# Altium PCB HW_Z-BAND_SMART_AMP_R1.PcbDoc (part 2 of 5)
Units mil, origin at the board's own origin, x right, y up, seen from the top; angles counter-clockwise.
Board outline 10200 x 3900 mil, 4 copper layers (Top Layer, Int1 (GND), Int2 (PWR), Bottom Layer), stack 60.134 mil thick; 398 components, 240 nets, 1098 pads, 2492 vias.
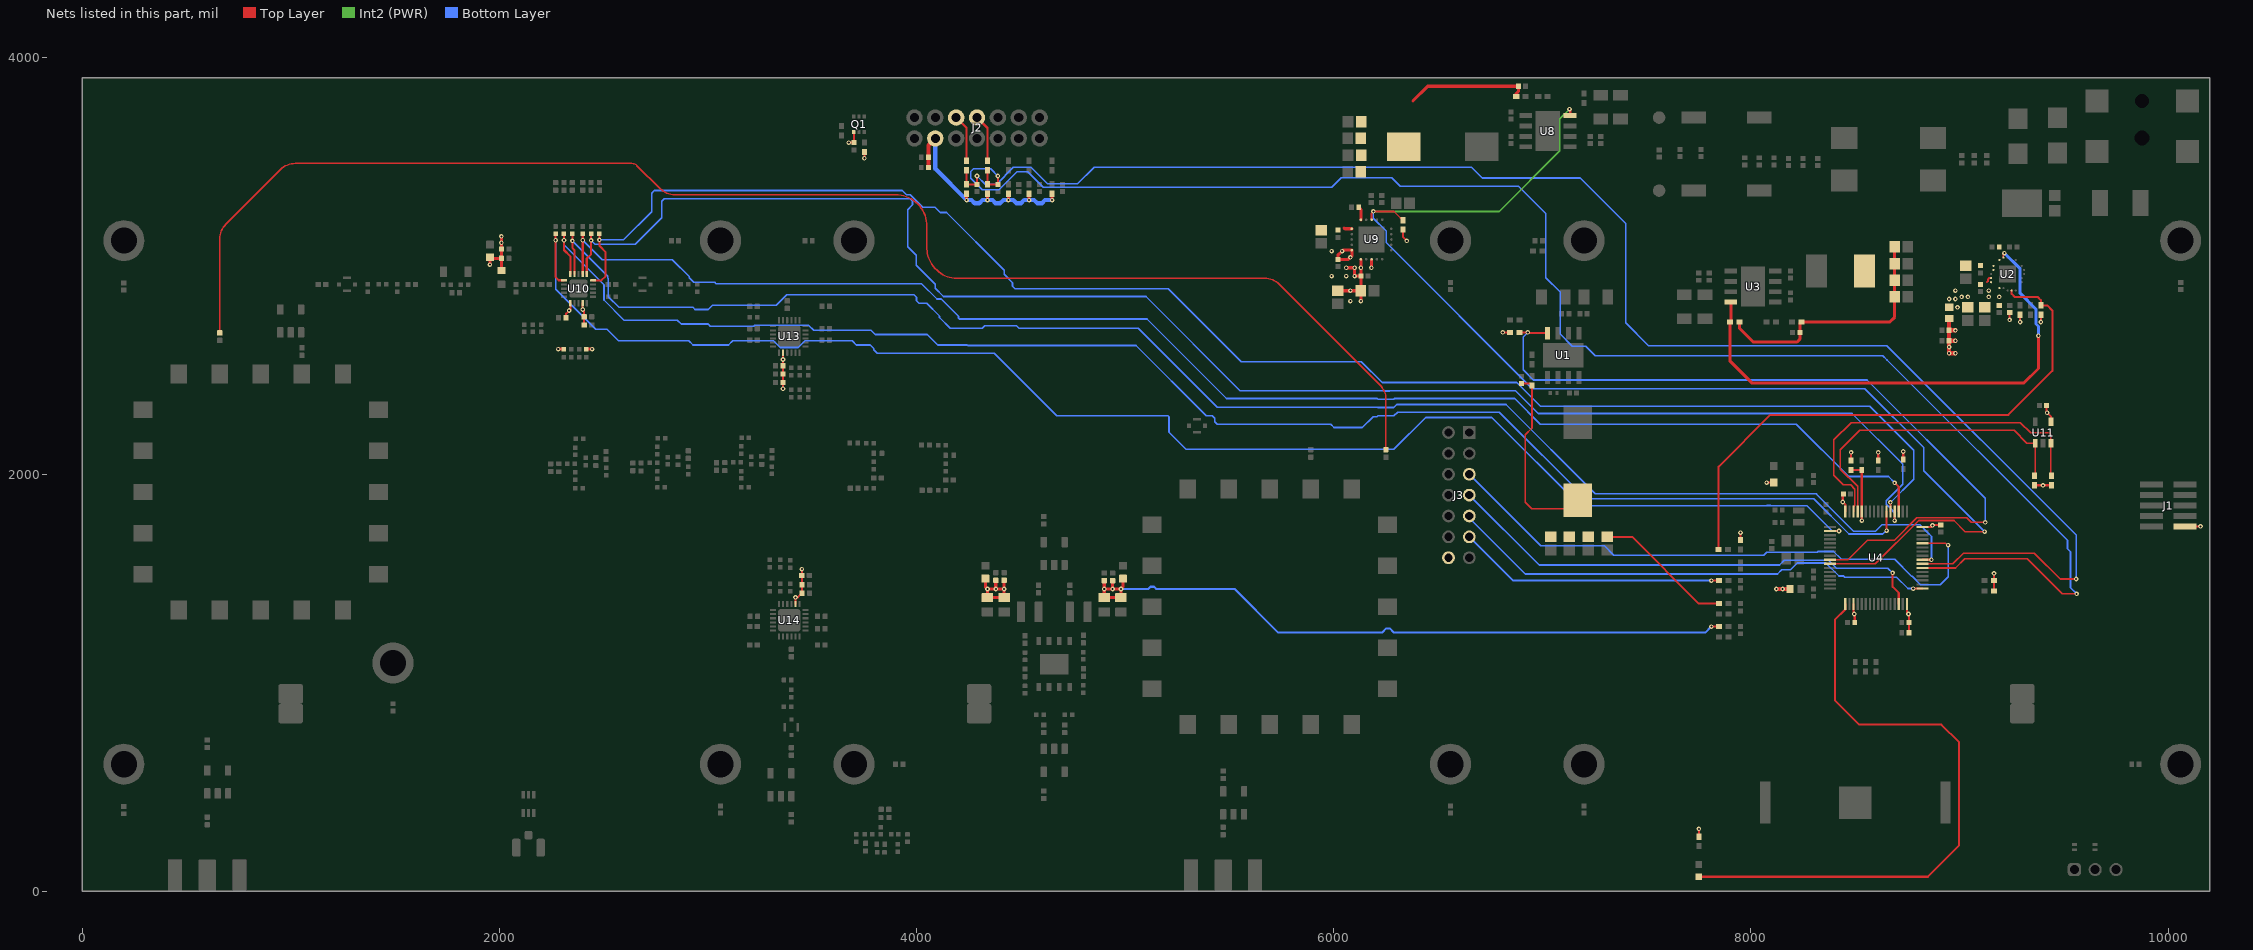
[diagram p4: the nets of this part, all layers, seen from the top]

## Footprints (in the part's own frame and the unit in brackets; to place one, negate y for a bottom-side part, rotate by r counter-clockwise, add the part's x,y. Pads: shape width x height; smd on the part's side, far side on the other; paste and mask are expansions set on the pad) (continued)
LQFP-64 [mil]
  rect 58x11 smd paste+0 mask+0: 1(-221.5,147.64) 2(-221.5,127.95) 3(-221.5,108.27) 4(-221.5,88.58) 5(-221.5,68.9) 6(-221.5,49.21) 7(-221.5,29.53) 8(-221.5,9.84) 9(-221.5,-9.84) 10(-221.5,-29.53) 11(-221.5,-49.21) 12(-221.5,-68.9) 13(-221.5,-88.58) 14(-221.5,-108.27) 15(-221.5,-127.95) 16(-221.5,-147.64) 33(221.5,-147.64) 34(221.5,-127.95) 35(221.5,-108.27) 36(221.5,-88.58) 37(221.5,-68.9) 38(221.5,-49.21) 39(221.5,-29.53) 40(221.5,-9.84) 41(221.5,9.84) 42(221.5,29.53) 43(221.5,49.21) 44(221.5,68.9) 45(221.5,88.58) 46(221.5,108.27) 47(221.5,127.95) 48(221.5,147.64)
  rect 11x58 smd paste+0 mask+0: 17(-147.64,-221.5) 18(-127.95,-221.5) 19(-108.27,-221.5) 20(-88.58,-221.5) 21(-68.9,-221.5) 22(-49.21,-221.5) 23(-29.53,-221.5) 24(-9.84,-221.5) 25(9.84,-221.5) 26(29.53,-221.5) 27(49.21,-221.5) 28(68.9,-221.5) 29(88.58,-221.5) 30(108.27,-221.5) 31(127.95,-221.5) 32(147.64,-221.5) 49(147.64,221.5) 50(127.95,221.5) 51(108.27,221.5) 52(88.58,221.5) 53(68.9,221.5) 54(49.21,221.5) 55(29.53,221.5) 56(9.84,221.5) 57(-9.84,221.5) 58(-29.53,221.5) 59(-49.21,221.5) 60(-68.9,221.5) 61(-88.58,221.5) 62(-108.27,221.5) 63(-127.95,221.5) 64(-147.64,221.5)
  silkscreen extent -270,-270 270,270, body extent -236,-236 236,236, height 63
MTG-PTH-3MM [mm]
  round 5 hole 3.175: 0(0,0)
"MURATA GRM155 0402_1005" [mm] "Chip Capacitor, 2-Leads, Body 1.0x0.50mm"
  rect 0.4x0.5 smd: 1(-0.4,0) 2(0.4,0)
  silkscreen extent -0.9,-0.5 0.9,0.5, body extent -0.52,-0.27 0.53,0.28, height 0.55
NU-1620 [mm] "W:30 L:30 P:5 mm"
  rect 2.31x2 smd: 1(-14.35,10) 2(-14.35,5) 3(-14.35,0) 4(-14.35,-5) 5(-14.35,-10) 11(14.35,-10) 12(14.35,-5) 13(14.35,0) 14(14.35,5) 15(14.35,10)
  rect 2x2.31 smd: 6(-10,-14.35) 7(-5,-14.35) 8(0,-14.35) 9(5,-14.35) 10(10,-14.35) 16(10,14.35) 17(5,14.35) 18(0,14.35) 19(-5,14.35) 20(-10,14.35)
  silkscreen extent -16.18,-15.08 15.08,15.07, body extent -15,-15 15,15, height 7.11
ONSC-SC70-6-419B-02_W_V [mm] "SOT23, 6-Leads, Body 2x1.25mm, Pitch 0.65mm"
  rect 0.5x0.4 smd: 1(-0.95,0.65) 2(-0.95,0) 3(-0.95,-0.65) 4(0.95,-0.65) 5(0.95,0) 6(0.95,0.65)
  silkscreen extent -1.07,-1 0.3,1.53, body extent -0.63,-1 0.63,1, height 1.1
QFN_20_PE4312 [mm] "W:4 L:4 P:0.5mm"
  rrect25% 0.75x0.28 smd: 1(-1.777,1) 2(-1.777,0.5) 3(-1.777,0) 4(-1.777,-0.5) 5(-1.777,-1) 11(1.777,-1) 12(1.777,-0.5) 13(1.777,0) 14(1.777,0.5) 15(1.777,1)
  rrect25% 0.28x0.75 smd: 6(-1,-1.777) 7(-0.5,-1.777) 8(0,-1.777) 9(0.5,-1.777) 10(1,-1.777) 16(1,1.777) 17(0.5,1.777) 18(0,1.777) 19(-0.5,1.777) 20(-1,1.777)
  rrect25% 2.2x2.2 smd: 21(0,0)
  silkscreen extent -2.13,-2.13 2.13,2.13, body extent -2,-2 2,2, height 0.99
"RES 0402_1005" [mm] "Chip Resistor, 2-Leads, Body 1.0x0.5mm, IPC Medium Density"
  rect 0.75x0.6 smd: 1(-0.575,0) 2(0.575,0)
  silkscreen extent -1.14,-0.51 1.14,0.51, body extent -0.5,-0.25 0.5,0.25, height 0.35
RES_0402_N [mm] "W:0.5 L:1 P:0.9 mm"
  rrect10% 0.55x0.55 smd: 1(-0.45,0) 2(0.45,0)
  body extent -0.53,-0.28 0.53,0.28, height 0.4
RES_0805_N [mm] "W:1.30 L:2.15 P:1.75mm IPC Medium Density"
  rrect10% 1.1x1.4 smd mask+0.102: 1(-0.875,0) 2(0.875,0)
  body extent -1.07,-0.7 1.08,0.7, height 0.6
SC70_SOT-363 [mm] "W:1.25 L:2.00 P:0.65mm"
  rrect10% 0.95x0.4 smd: 1(-1.1,0.65) 2(-1.1,0) 3(-1.1,-0.65) 4(1.1,-0.65) 5(1.1,0) 6(1.1,0.65)
  silkscreen extent -1.14,-1 0.3,1.52, body extent -1.2,-1.07 1.2,1.07, height 1.1
SOD-123 [mm] "SOD, 2-Leads, Body 1.55x3.70mm, IPC Medium Density"
  rect 0.9x0.95 smd: 1(-1.575,0) 2(1.575,0)
  silkscreen extent -2.3,-0.92 2.41,0.92, body extent -1.86,-0.78 1.86,0.77, height 1.35
SOIC-8N_EP [mm]
  rect 0.95x0.55 smd: 1(-2.8,1.905) 2(-2.8,0.635) 3(-2.8,-0.635) 4(-2.8,-1.905) 5(2.8,-1.905) 6(2.8,-0.635) 7(2.8,0.635) 8(2.8,1.905)
  rect 2.5x3.5 smd paste-1.25: 9(0,0)
  silkscreen extent -3.21,-2.58 2.07,2.58, body extent -3.05,-2.5 3.05,2.5, height 1.6
SOT89 [mm] "W:4.50 L:4.2 P:1.50mm"
  rect 1.27x0.86 smd: 1(-1.8,1.5) 3(-1.8,-1.5)
  round 0.025 smd: 2(0.037,0)
  silkscreen extent -2,-2.3 1.32,2.47, body extent -2.2,-2.3 1.85,2.3, height 1.6
TDK-ACM1211-4_V [mm] "SMD, 4-Leads, Body 12.3x11.3mm, Pitch 5.2mm"
  rect 3.2x2.7 smd: 1(-5.4,-2.6) 2(-5.4,2.6) 3(5.4,2.6) 4(5.4,-2.6)
  silkscreen extent -7.68,-5.65 6.15,5.65, body extent -6.15,-5.67 6.15,5.65, height 6
TEST_POINT_SMD [mil]
  round 60 smd: 1(0,0)
WE-LHCA_7030 [mm] "SMD Power Inductor, 2-Leads, body 6.95 x 6.60 mm"
  rect 4x2.55 smd: 1(0,2.925) 2(0,-2.925)
  silkscreen extent -3.45,-3.45 3.45,4.82, body extent -3.3,-3.47 3.3,3.48, height 3.01
WE-LHMI_1040 [mm] "SMT Power Inductor, 2-Leads, body 10x10mm"
  rect 4.1x3.5 smd: 1(-1274.75,-1270) 2(-1265.25,-1270)
  Top Layer keep-out region: -1272.6,-1264.85 -1267.4,-1264.85 -1267.4,-1275.15 -1272.6,-1275.15
  silkscreen extent -1277.42,-1275.15 -1264.85,-1264.85, body extent -1275.5,-1275 -1264.5,-1265, height 3.8
WE-PBF_8530_L9.5W3H3.1 [mm] "Flat Wire High Current SMT Ferrite Bead, body 9.50x3.00mm"
  rect 3x1.47 smd: 1(-4,0) 2(4,0)
  silkscreen extent -4.4,-1.6 4.4,1.6, body extent -4.45,-1.5 4.45,1.5, height 2.76
"WURTH WE-PHD 61300311121" [mm] "Pin Header, pitch 2.54 mm, THT, Vertical, single row, 3p"
  rrect50% 1.6x1.6 hole 1.1: 1(-2.54,0)
  round 1.6 hole 1.1: 2(0,0) 3(2.54,0)
  silkscreen extent -4.53,-1.35 3.96,1.35, body extent -3.81,-1.27 3.81,1.27, height 8.57

## Part data
BT1: library part CMP-19636-000006-1, "BATTERY RETAINER COIN 20MM SMD", Manufacturer="Keystone Electronics", Automotive=No, Category=Batt, ComponentLink2Description=Datasheet, ComponentLink2URL=https://www.keyelco.com/product-pdf.cfm?p=798, Contact Material=Nickel, Device Class L1=Connectors, Device Class L2=unset, Device Class L3=unset, Digikey Description="BATTERY RETAINER COIN 20MM SMD", Height=4.31mm, Lead Free=Yes, Manufacturer Part Number=3034, Mouser Description="Coin Cell Battery Holders COIN CELL RETAINER", Number of Contacts=2, Octopart=https://octopart.com/3034-keystone-27554462, Package=3034, RoHS=TRUE
C1 C17 C43 C71 C74 C90 C96: library part GRM155C71A105KE11D, "CAP CER 1UF 10V X7S 0402", Device Package="0402 (1005 Metric)", Manufacturer="Murata Electronics", Operating Temperature="-55°C ~ 125°C", Supplier Part Number 1=490-14457-1-ND, Temperature Coefficient=X7S, Tolerance=±10%, Voltage - Rated=10V, Applications="General Purpose", Capacitance="1 µF", ComponentLink1Description=Datasheet, ComponentLink1URL=https://search.murata.co.jp/Ceramy/image/img/A01X/G101/ENG/GRM155C71A105KE11-01.pdf, ComponentLink2Description="DigiKey Link", ComponentLink2URL=https://www.digikey.com/en/products/detail/murata-electronics/GRM155C71A105KE11D/6606086, Lifecycle Status=Active, Minimum Order=1, Mounting Type="Surface Mount, MLCC", Package / Case="0402 (1005 Metric)", Packaging=TapeAndReel, Part Number=GRM155C71A105KE11D, Part Status=Active, PartId=1749, Price=0.01, Series=GRM, Size / Dimension="0.039\" L x 0.020\" W (1.00mm x 0.50mm)", Supplier 1=DigiKey, Thickness (Max)="0.024\" (0.60mm)"
  C1: LastUpdated="23.07.2025 10:42:36"
  C17 C43 C71 C74 C90 C96: LastUpdated="4/6/2026 7:11:12 PM"
C2 C5 C6 C14 C15 C16 C18 C19 C20 C21 C22 C23 C24 C27 C30 C33 C44 C47 C48 C54 C63 C64 C66 C72 C73 C75 C78 C79 C86 C91 C92 C94 C95 C97 C98 C100 C103: library part GCM155R71H104KE02J, "CAP CER 0.1UF 50V X7R 0402", Device Package="0402 (1005 Metric)", Manufacturer="Murata Electronics", Operating Temperature="-55°C ~ 125°C", Ratings=AEC-Q200, Supplier Part Number 1=490-14514-1-ND, Temperature Coefficient=X7R, Tolerance=±10%, Voltage - Rated=50V, Applications=Automotive, Capacitance="0.1 µF", ComponentLink1Description=Datasheet, ComponentLink1URL=https://search.murata.co.jp/Ceramy/image/img/A01X/G101/ENG/GCM155R71H104KE02-01.pdf, ComponentLink2Description="DigiKey Link", ComponentLink2URL=https://www.digikey.com/en/products/detail/murata-electronics/GCM155R71H104KE02J/4903705, LastUpdated="4/6/2026 7:10:30 PM", Lifecycle Status=Active, Minimum Order=1, Mounting Type="Surface Mount, MLCC", Package / Case="0402 (1005 Metric)", Packaging=TapeAndReel, Part Number=GCM155R71H104KE02J, Part Status=Active, PartId=11356, Price=0.01, Series=GCM, Size / Dimension="0.039\" L x 0.020\" W (1.00mm x 0.50mm)", Supplier 1=DigiKey, Thickness (Max)="0.022\" (0.55mm)"
C3 C4 C45 C46 C76 C77: library part CL31B106KBHNNNE, "CAP CER 10UF 50V X7R 1206", Device Package="1206 (3216 Metric)", Manufacturer="Samsung Electro-Mechanics", Operating Temperature="-55°C ~ 125°C", Supplier Part Number 1=1276-6767-1-ND, Temperature Coefficient=X7R, Tolerance=±10%, Voltage - Rated=50V, Applications="General Purpose", Capacitance="10 µF", ComponentLink1Description=Datasheet, ComponentLink1URL=http://www.samsungsem.com/kr/support/product-search/mlcc/CL31B106KBHNNNE.jsp, ComponentLink2Description="DigiKey Link", ComponentLink2URL=https://www.digikey.com/en/products/detail/samsung-electro-mechanics/CL31B106KBHNNNE/5961251, LastUpdated="4/6/2026 7:38:00 PM", Lifecycle Status=Active, Minimum Order=1, Mounting Type="Surface Mount, MLCC", Package / Case="1206 (3216 Metric)", Packaging=TapeAndReel, Part Number=CL31B106KBHNNNE, Part Status=Active, PartId=40563, Price=0.06, Series=CL, Size / Dimension="0.126\" L x 0.063\" W (3.20mm x 1.60mm)", Supplier 1=DigiKey, Thickness (Max)="0.071\" (1.80mm)"
C7 C12 C13 C25 C28 C31 C34 C36 C37 C38 C39 C40 C41 C42 C49 C67 C80 C87 C160 C161 C162 C163: library part C0402H102J1GAC7867, "CAP CER 1000PF 100V C0G/NP0 0402", Device Package="0402 (1005 Metric)", Manufacturer=KEMET, Operating Temperature="-55°C ~ 200°C", Supplier Part Number 1=399-11931-1-ND, Temperature Coefficient="C0G, NP0", Tolerance=±5%, Voltage - Rated=100V, Applications=Downhole, Capacitance="1000 pF", ComponentLink1Description=Datasheet, ComponentLink1URL=https://api.kemet.com/component-edge/download/datasheet/C0402H102J1GAC7867.pdf, ComponentLink2Description="DigiKey Link", ComponentLink2URL=https://www.digikey.com/en/products/detail/kemet/C0402H102J1GAC7867/5267578, Features="Low ESL, High Temperature", LastUpdated="3/30/2026 7:10:31 PM", Lifecycle Status=Active, Minimum Order=1, Mounting Type="Surface Mount, MLCC", Package / Case="0402 (1005 Metric)", Packaging=TapeAndReel, Part Number=C0402H102J1GAC7867, Part Status=Active, PartId=3822, Price=0.24, Series="SMD Indust C0G HT200C", Size / Dimension="0.039\" L x 0.020\" W (1.00mm x 0.50mm)", Supplier 1=DigiKey, Thickness (Max)="0.022\" (0.55mm)"
C8 C9 C10 C11 C50 C51 C52 C53 C65 C69 C70 C81 C82 C83 C84 C85 C88 C89: library part CL21A226KOQNNNE, "CAP CER 22UF 16V X5R 0805", Device Package="0805 (2012 Metric)", Manufacturer="Samsung Electro-Mechanics", Operating Temperature="-55°C ~ 85°C", Supplier Part Number 1=1276-6526-1-ND, Temperature Coefficient=X5R, Tolerance=±10%, Voltage - Rated=16V, Applications="General Purpose", Capacitance="22 µF", ComponentLink1Description=Datasheet, ComponentLink1URL=http://www.samsungsem.com/kr/support/library/product-catalog/mlcc.jsp, ComponentLink2Description="DigiKey Link", ComponentLink2URL=https://www.digikey.com/en/products/detail/samsung-electro-mechanics/CL21A226KOQNNNE/5961010, LastUpdated="4/6/2026 7:33:17 PM", Lifecycle Status=Active, Minimum Order=1, Mounting Type="Surface Mount, MLCC", Package / Case="0805 (2012 Metric)", Packaging=TapeAndReel, Part Number=CL21A226KOQNNNE, Part Status=Active, PartId=3004, Price=0.06, Series=CL, Size / Dimension="0.079\" L x 0.049\" W (2.00mm x 1.25mm)", Supplier 1=DigiKey, Thickness (Max)="0.055\" (1.40mm)"
C26 C29 C32 C35: library part CC0402JRNPO0BN101, "CAP CER 100PF 100V C0G/NPO 0402", Device Package="0402 (1005 Metric)", Manufacturer=Yageo, Operating Temperature="-55°C ~ 125°C", Supplier Part Number 1=13-CC0402JRNPO0BN101CT-ND, Temperature Coefficient="C0G, NP0", Tolerance=±5%, Voltage - Rated=100V, Applications="General Purpose", Capacitance="100 pF", ComponentLink1Description=Datasheet, ComponentLink1URL=https://www.yageo.com/upload/media/product/productsearch/datasheet/mlcc/UPY-NP0X7R_MV_100-to-630V_24.pdf, ComponentLink2Description="DigiKey Link", ComponentLink2URL=https://www.digikey.com/en/products/detail/yageo/CC0402JRNPO0BN101/11490291, LastUpdated="4/6/2026 7:09:54 PM", Lifecycle Status=Active, Minimum Order=1, Mounting Type="Surface Mount, MLCC", Package / Case="0402 (1005 Metric)", Packaging=TapeAndReel, Part Number=CC0402JRNPO0BN101, Part Status=Active, PartId=44692, Price=0.01, Series=CC, Size / Dimension="0.039\" L x 0.020\" W (1.00mm x 0.50mm)", Supplier 1=DigiKey, Thickness (Max)="0.022\" (0.55mm)"
C55 C68 C93 C102 C104: library part AC0402KPX7R9BB103, "CAP CER 10000PF 50V X7R 0402", Device Package="0402 (1005 Metric)", Manufacturer=Yageo, Operating Temperature="-55°C ~ 125°C", Ratings=AEC-Q200, Supplier Part Number 1=311-3267-1-ND, Temperature Coefficient=X7R, Tolerance=±10%, Voltage - Rated=50V, Applications=Automotive, Capacitance="10000 pF", ComponentLink1Description=Datasheet, ComponentLink1URL=http://www.yageo.com/documents/recent/UPY-AC_NP0X7R_16V-to-630V_12.pdf, ComponentLink2Description="DigiKey Link", ComponentLink2URL=https://www.digikey.com/en/products/detail/yageo/AC0402KPX7R9BB103/6643253, LastUpdated="4/6/2026 7:11:07 PM", Lifecycle Status=Active, Minimum Order=1, Mounting Type="Surface Mount, MLCC", Package / Case="0402 (1005 Metric)", Packaging=CutTape, Part Number=AC0402KPX7R9BB103, Part Status=Active, PartId=2384, Price=0.01, Series=AC, Size / Dimension="0.039\" L x 0.020\" W (1.00mm x 0.50mm)", Supplier 1=DigiKey, Thickness (Max)="0.022\" (0.55mm)"
C56: library part GRM155R71H104KE14J, "CAP CER 0.1UF 50V X7R 0402", Device Package="0402 (1005 Metric)", Manufacturer="Murata Electronics", Operating Temperature="-55°C ~ 125°C", Supplier Part Number 1=490-13342-1-ND, Temperature Coefficient=X7R, Tolerance=±10%, Voltage - Rated=50V, Applications="General Purpose", Capacitance="0.1 µF", ComponentLink1Description=Datasheet, ComponentLink1URL=https://search.murata.co.jp/Ceramy/image/img/A01X/G101/ENG/GRM155R71H104KE14-01.pdf, ComponentLink2Description="DigiKey Link", ComponentLink2URL=https://www.digikey.com/en/products/detail/murata-electronics/GRM155R71H104KE14J/4905180, LastUpdated="4/6/2026 7:11:00 PM", Lifecycle Status=Active, Minimum Order=1, Mounting Type="Surface Mount, MLCC", Package / Case="0402 (1005 Metric)", Packaging=CutTape, Part Number=GRM155R71H104KE14J, Part Status=Active, PartId=4071, Price=0.01, Series=GRM, Size / Dimension="0.039\" L x 0.020\" W (1.00mm x 0.50mm)", Supplier 1=DigiKey, Thickness (Max)="0.022\" (0.55mm)"
C57 C58 C59 C62: library part CC0402GRNPO9BN150, "CAP CER 15PF 50V C0G/NPO 0402", Device Package="0402 (1005 Metric)", Manufacturer=Yageo, Operating Temperature="-55°C ~ 125°C", Supplier Part Number 1=311-1649-1-ND, Temperature Coefficient="C0G, NP0", Tolerance=±2%, Voltage - Rated=50V, Applications="General Purpose", Capacitance="15 pF", ComponentLink1Description=Datasheet, ComponentLink1URL=https://www.yageo.com/upload/media/product/productsearch/datasheet/mlcc/UPY-GP_NP0_16V-to-50V_17.pdf, ComponentLink2Description="DigiKey Link", ComponentLink2URL=https://www.digikey.com/en/products/detail/yageo/CC0402GRNPO9BN150/5195058, LastUpdated="4/6/2026 7:11:11 PM", Lifecycle Status=Active, Minimum Order=1, Mounting Type="Surface Mount, MLCC", Package / Case="0402 (1005 Metric)", Packaging=TapeAndReel, Part Number=CC0402GRNPO9BN150, Part Status=Active, PartId=1901, Price=0.01, Series=CC, Size / Dimension="0.039\" L x 0.020\" W (1.00mm x 0.50mm)", Supplier 1=DigiKey, Thickness (Max)="0.022\" (0.55mm)"
C60 C138 C155: "CAP CER 4.7uF 16V X7R 0603 ±10%", Manufacturer 1="MURATA ELECTRONICS", Manufacturer Part Number 1=GRM188Z71C475KE21D, Package=0603, PackageType=SMD, Supplier Part Number 1=490-GRM188Z71C475KE21DTR-ND, Tolerance=±10%, Check=Approved, ComponentLink1Description=DigiKey, ComponentLink1URL=https://www.digikey.com/en/products/detail/murata-electronics/GRM188Z71C475KE21D/13401930, ComponentLink2Description=Datasheet, ComponentLink2URL="D:\SAVRONIK_SVN\Donanım\trunk\ALTIUM\Central Library\Datasheets\Capacitor\GRM188Z71C475KE21-01A_Datasheet.pdf", Location=NA, MaxHeight_mm=0.95, MSL Level=Level-1, Status=Active, Supplier 1=Digikey, UnitPrice=0.28
C61 C101 C105 C125 C126 C127 C128 C136 C153: "CAP CER 100nF 50V X7R 0402 ±10%", Manufacturer 1="TDK CORPORATION", Manufacturer Part Number 1=CGA2B3X7R1H104K050BB, Package=0402, PackageType=SMD, Supplier Part Number 1=445-6899-2-ND, Tolerance=±10%, Check=Approved, ComponentLink2Description=Datasheet, ComponentLink2URL="D:\SAVRONIK_SVN\Donanım\trunk\ALTIUM\Central Library\Datasheets\Capacitor\CGA2B3X7R1H104K050BB_Datasheet.pdf", ComponentLink3Description=DigiKey, ComponentLink3URL=https://www.digikey.com/en/products/detail/tdk-corporation/CGA2B3X7R1H104K050BB/2672792, Location=NA, MaxHeight_mm=0.55, MSL Level=Level-1, Status=Active, Supplier 1=Digikey, UnitPrice=0.1
C99 C118 C119 C120 C121 C122 C123 C124 C129: "CAP CER 100pF 50V NP0 0402 ±1%", M_OperatingPower(W)=NA, M_RatedVoltage(V)=50, Manufacturer 1=TDK, Manufacturer Part Number 1=C1005C0G1H101F050BA, Package=0402, PackageType=SMD, Supplier Part Number 1=445-5362-2-ND, Tolerance=±1%, Check=Approved, ComponentLink2Description=Datasheet, ComponentLink3Description=DigiKey, ComponentLink3URL=https://www.digikey.com/en/products/detail/tdk-corporation/C1005C0G1H101F050BA/2269856?s=N4IgTCBcDaIMIEYAMSCsckHEEAlkIDE0kAhAQRAF0BfIA, Location=NA, M_AmpersPerContact=NA, M_Duty Cycle(%)=NA, M_MatingCycle=NA, M_Number_of_Bits(K)=NA, M_Number_of_Pins=2, M_Number_of_Transistors_Gates_or_Bits=NA, M_ProgrammingCycles=NA, M_RatedPower(W)=NA, M_ThermalResistance(θJABC)(°C/W)=NA, MaxHeight_mm=0.55, MSL Level=Level-1, Status=Active, Supplier 1=Digi-Key, UnitPrice=0.1
C106 C107 C108 C109 C110 C113 C130 C131 C132 C133 C134 C135 C137 C139 C140 C141 C142 C143 C144 C145 C146 C147 C148 C149 C150 C151 C152 C154 C164 C165 C167 C172 C174 C175 C176 C188 C189: "CAP CER 10nF 50V X7R 0402 ±10%", M_OperatingPower(W)=NA, M_RatedVoltage(V)=50, Manufacturer 1=KEMET, Manufacturer Part Number 1=C0402C103K5RAC7867, Package=0402, PackageType=SMD, Supplier Part Number 1=399-C0402C103K5RAC7867TR-ND, Tolerance=±10%, Check=Approved, ComponentLink2Description=Datasheet, ComponentLink3Description=DigiKey, ComponentLink3URL=https://www.digikey.com/en/products/detail/kemet/C0402C103K5RAC7867/501968, Location=NA, M_AmpersPerContact=NA, M_Duty Cycle(%)=NA, M_ESR(mΩ)=NA, M_MatingCycle=NA, M_Number_of_Bits(K)=NA, M_Number_of_Pins=2, M_Number_of_Transistors_Gates_or_Bits=NA, M_ProgrammingCycles=NA, M_RatedPower(W)=NA, M_ThermalResistance(θJABC)(°C/W)=NA, MaxHeight_mm=0.55, MSL Level=Level-1, Status=Active, Supplier 1=Digi-Key, UnitPrice=0.1
C111 C112 C117: "CAP CER 1nF 50V X7R 0402 ±10%", Manufacturer 1=KEMET, Manufacturer Part Number 1=C0402C102K5RAC7867, Package=0402, PackageType=SMD, Tolerance=±10%, Check=Approved, ComponentLink2Description=Datasheet, ComponentLink3Description=DigiKey, ComponentLink3URL=https://www.digikey.com/en/products/detail/kemet/C0402C102K5RAC7867/411034, Location=NA, MaxHeight_mm=0.65, MSL Level=Level-1, Status=Active, UnitPrice=0.1
C115: library part UMF212B7105KGHT, "CAP CER 1UF 50V X7R 0805", Device Package="0805 (2012 Metric)", Manufacturer="Taiyo Yuden", Operating Temperature="-55°C ~ 125°C", Ratings=AEC-Q200, Supplier Part Number 1=587-6523-1-ND, Temperature Coefficient=X7R, Tolerance=±10%, Voltage - Rated=50V, Applications="Automotive, SMPS Filtering", Capacitance="1 µF", ComponentLink1Description=Datasheet, ComponentLink1URL=https://ds.yuden.co.jp/TYCOMPAS/ut/detail?pn=UMF212B7105KGHT&u=M, ComponentLink2Description="DigiKey Link", ComponentLink2URL=https://www.digikey.com/en/products/detail/taiyo-yuden/UMF212B7105KGHT/10379089, LastUpdated="4/6/2026 7:32:13 PM", Lifecycle Status=Active, Minimum Order=1, Mounting Type="Surface Mount, MLCC", Package / Case="0805 (2012 Metric)", Packaging=TapeAndReel, Part Number=UMF212B7105KGHT, Part Status=Active, PartId=26382, Price=0.04, Series=M, Size / Dimension="0.079\" L x 0.049\" W (2.00mm x 1.25mm)", Supplier 1=DigiKey, Thickness (Max)="0.053\" (1.35mm)"
C116 C156 C158 C171 C173 C179 C187 C190: "CAP CER 3.3nF 50V X7R 0402 ±5%", M_OperatingPower(W)=NA, M_RatedVoltage(V)=50V, Manufacturer 1="MURATA ELECTRONICS", Manufacturer Part Number 1=GRM155R71H332JA01D, Package=0402, PackageType=SMD, Supplier Part Number 1=490-10780-2-ND, Tolerance=±5%, Check=Approved, ComponentLink2Description=Datasheet, ComponentLink3Description=DigiKey, ComponentLink3URL=https://www.digikey.com/en/products/detail/murata-electronics/GRM155R71H332JA01D/5251319?utm_adgroup=&utm_source=google&utm_medium=cpc&utm_campaign=Pmax_Product_All%20Products&utm_term=&utm_content=&utm_id=go_cmp-18790247214_adg-_ad-__dev-c_ext-_prd-_sig-EAIaIQobChMI-qDC4avGhQMVhkVBAh32KAqJEAAYAiAAEgIqzvD_BwE&gad_source=1&gclid=EAIaIQobChMI-qDC4avGhQMVhkVBAh32KAqJEAAYAiAAEgIqzvD_BwE, Location=NA, M_AmpersPerContact=NA, M_Duty Cycle(%)=NA, M_MatingCycle=NA, M_Number_of_Bits(K)=NA, M_Number_of_Pins=2, M_Number_of_Transistors_Gates_or_Bits=NA, M_ProgrammingCycles=NA, M_RatedPower(W)=NA, M_ThermalResistance(θJABC)(°C/W)=NA, MaxHeight_mm=0.55, MSL Level=Level-1, Status=Active, Supplier 1=Digi-Key, UnitPrice=0.1
  C116 C156 C171 C173 C179 C187 C190: Assembly=DNP
C157 C159 C170 C177: "CAP CER 5pF 50V C0G/NP0 0402 ±0.1pF", M_OperatingPower(W)=NA, M_RatedVoltage(V)=50, Manufacturer 1=MURATA, Manufacturer Part Number 1=GJM1555C1H5R0BB01D, Package=0402, PackageType=SMD, Supplier Part Number 1=490-8103-2-ND, Tolerance=±0.1pF, Check=Approved, ComponentLink2Description=Datasheet, ComponentLink3Description=DigiKey, ComponentLink3URL=https://www.digikey.com/en/products/detail/murata-electronics/GJM1555C1H5R0BB01D/2593016, Location=NA, M_AmpersPerContact=NA, M_Duty Cycle(%)=NA, M_MatingCycle=NA, M_Number_of_Bits(K)=NA, M_Number_of_Pins=2, M_Number_of_Transistors_Gates_or_Bits=NA, M_ProgrammingCycles=NA, M_RatedPower(W)=NA, M_ThermalResistance(θJABC)(°C/W)=NA, MaxHeight_mm=0.55, MSL Level=Level-1, Status=Active, Supplier 1=Digi-Key, UnitPrice=0.14
  C157 C170 C177: Assembly=DNP
C166: "CAP CER 10nF 50V X7R 0402 ±10%", M_OperatingPower(W)=NA, M_RatedVoltage(V)=50, Manufacturer 1=KEMET, Manufacturer Part Number 1=C0402C103K5RAC7867, PackageType=SMD, Supplier Part Number 1=399-C0402C103K5RAC7867TR-ND, Tolerance=±10%, Check=Approved, ComponentLink2Description=Datasheet, ComponentLink3Description=DigiKey, ComponentLink3URL=https://www.digikey.com/en/products/detail/kemet/C0402C103K5RAC7867/501968, Location=NA, M_AmpersPerContact=NA, M_Duty Cycle(%)=NA, M_ESR(mΩ)=NA, M_MatingCycle=NA, M_Number_of_Bits(K)=NA, M_Number_of_Pins=2, M_Number_of_Transistors_Gates_or_Bits=NA, M_ProgrammingCycles=NA, M_RatedPower(W)=NA, M_ThermalResistance(θJABC)(°C/W)=NA, MaxHeight_mm=0.55, MSL Level=Level-1, Status=Active, Supplier 1=Digi-Key, UnitPrice=0.1
C168: "CAP CER 0.5pF 50V C0G/NP0 0402 ±0.1pF", Manufacturer 1="MURATA ELECTRONICS", Manufacturer Part Number 1=GJM1555C1HR50BB01J, Package=0402, PackageType=SMD, Supplier Part Number 1=490-8105-2-ND, Tolerance=±0.1pF, Check=Approved, ComponentLink2Description=Datasheet, ComponentLink3Description=DigiKey, ComponentLink3URL=https://www.digikey.com/en/products/detail/murata-electronics/GJM1555C1HR50BB01J/2593251, Location=NA, MaxHeight_mm=0.55, MSL Level=Level-1, Status=Active, Supplier 1=Digi-Key, UnitPrice=0.1
C169: "CAP CER 20pF 50V C0G/NP0 0402 ±1%", Manufacturer 1="MURATA ELECTRONICS", Manufacturer Part Number 1=GJM1555C1H200FB01D, Package=0402, PackageType=SMD, Supplier Part Number 1=490-11204-2-ND, Tolerance=±1%, Check=Approved, ComponentLink2Description=Datasheet, ComponentLink3Description=DigiKey, ComponentLink3URL=https://www.digikey.com/en/products/detail/murata-electronics/GJM1555C1H200FB01D/2592908, Location=NA, MaxHeight_mm=0.55, MSL Level=Level-1, Status=Active, Supplier 1=Digi-Key, UnitPrice=0.1
D1 D10: library part CMP-08607-000062-1, "TVS DIODE 7V 10V 0402", Breakdown Voltage=9.8V, Capacitance=0.1pF, Clamping Voltage=10V, Manufacturer=Littelfuse, Package=SESD0402, Peak Pulse Current=2A, Reverse Standoff Voltage=7V, Temperature="-55°C to +125°C", Temperature Range High=+125°C, Temperature Range Low=-55°C, Automotive=Yes, Automotive Grade="Grade 1", Category=Diode, ComponentLink2Description=Datasheet, ComponentLink2URL=https://www.littelfuse.com/~/media/electronics/datasheets/tvs_diode_arrays/littelfuse_tvs_diode_array_sesd_ultra_low_capacitance_discrete_tvs_datasheet.pdf.pdf, Device Class L1="Circuit Protection", Device Class L2="TVS Diodes", Device Class L3=unset, Digikey Description="TVS DIODE 7V 10V 0402", Direction=Bidirectional, Height=0.43mm, Lead Free=Yes, Manufacturer Part Number=RF2945-000, Number of Channels=1, Octopart=https://octopart.com/rf2945-000-littelfuse-56516902, RoHS=TRUE, Standoff Height=0mm
D3: "DIODE SCHOTTKY 60V 8A PWRDI5 5K", Current - Average Rectified (Io)=8A, Current - Reverse Leakage @ Vr="200 µA @ 60 V", Manufacturer="Diodes Incorporated", Operating Temperature - Junction="-55°C ~ 150°C", Supplier Device Package="PowerDI™ 5", Supplier Part Number 1=31-SDT8A60VP5-13CT-ND, Voltage - DC Reverse (Vr) (Max)="60 V", Voltage - Forward (Vf) (Max) @ If="540 mV @ 8 A", ComponentLink1Description=Datasheet, ComponentLink1URL=https://www.diodes.com/assets/Datasheets/SDT8A60VP5.pdf, ComponentLink2Description="DigiKey Link", ComponentLink2URL=https://www.digikey.com/en/products/detail/diodes-incorporated/SDT8A60VP5-13/16547989, LastUpdated="4/5/2026 9:26:18 PM", Lifecycle Status=Active, Minimum Order=1, Mounting Type="Surface Mount", Packaging=TapeAndReel, Part Number=SDT8A60VP5-13, PartId=3631, Price=0.12, Series=-, Speed="Fast Recovery =< 500ns, > 200mA (Io)", Supplier 1=DigiKey
D4 D5: library part CMP-15642-000001-1, "TVS DIODE 14V 23.2V DO214AA", Breakdown Voltage=15.6V, Clamping Voltage=23.2V, Manufacturer="Taiwan Semiconductor Corporation", Max Junction Temp=+150°C, Package=SMBJ, Peak Pulse Current=27A, Peak Pulse Power=600W, Reverse Standoff Voltage=14V, Temperature="-55°C to +150°C", Temperature Range Low=-55°C, Automotive=No, Category=Diode, ComponentLink2Description=Datasheet, ComponentLink2URL=https://www.taiwansemi.com/products/datasheet/SMBJ%20SERIES_P1812.pdf, Device Class L1="Circuit Protection", Device Class L2="TVS Diodes", Device Class L3=unset, Digikey Description="TVS DIODE 14V 23.2V DO214AA", Direction=Unidirectional, Height=2.65mm, Lead Free=Yes, Manufacturer Part Number=SMBJ14A, Mouser Description="TVS Diodes - Transient Voltage Suppressors 14V 600W 5% Uni", Number of Channels=1, Octopart=https://octopart.com/smbj14a-taiwan+semiconductor-13998009, RoHS=TRUE, Standoff Height=0.05mm, Temperature Range High=+150°C
D6: library part TLMP1100-GS08, "LED GREEN 0603 SMD", Current - Test=20mA, Device Package="0603 (1608 Metric)", Lens Color=0.65mm, Manufacturer="Vishay Semiconductor Opto Division", Millicandela Rating=15mcd, Supplier Device Package=0603, Supplier Part Number 1=751-1176-1-ND, Voltage - Forward (Vf) (Typ)=2.1V, Color=Green, ComponentLink1Description=Datasheet, ComponentLink1URL=http://www.vishay.com/docs/83173/tlmb1100.pdf, ComponentLink2Description="DigiKey Link", ComponentLink2URL=https://www.digikey.com/en/products/detail/vishay-semiconductor-opto-division/TLMP1100-GS08/1681311, Configuration=Standard, Height (Max)=0.65mm, LastUpdated="3/11/2024 7:51:09 AM", Lens Size="1.60mm x 0.80mm", Lens Style="Rectangle with Flat Top", Lifecycle Status=Active, Minimum Order=1, Mounting Type="Surface Mount", Package / Case="0603 (1608 Metric)", Packaging=TapeAndReel, Part Number=TLMP1100-GS08, Part Status=Active, PartId=692, Price=0.11, Series="Automotive, AEC-Q101", Size / Dimension="1.60mm L x 0.80mm W", Supplier 1=DigiKey, Viewing Angle=160°, Wavelength - Dominant=561nm, Wavelength - Peak=562nm
D7 D9: "DIODE SCHOTTKY 20V 500MA SOD123", Current - Average Rectified (Io)=500mA, Current - Reverse Leakage @ Vr="250µA @ 20V", Manufacturer="ON Semiconductor", Operating Temperature - Junction="-65°C ~ 125°C", Package / Case=SOD-123, Supplier Part Number 1=MBR0520LT1GOSCT-ND, Voltage - DC Reverse (Vr) (Max)=20V, Voltage - Forward (Vf) (Max) @ If="385mV @ 500mA", ComponentLink1Description=Datasheet, ComponentLink1URL=http://www.onsemi.com/pub/Collateral/MBR0520LT1-D.PDF, ComponentLink2Description="DigiKey Link", ComponentLink2URL=http://digikey.com/product-detail/en/on-semiconductor/MBR0520LT1G/MBR0520LT1GOSCT-ND/917965, Diode Type=Schottky, LastUpdated="6/3/2024 7:54:46 PM", Lifecycle Status=Active, Minimum Order=1, Mounting Type="Surface Mount", Packaging=TapeAndReel, Part Number=MBR0520LT1G, Part Status=Active, PartId=2222, Price=0.05, Series=-, Speed="Fast Recovery =< 500ns, > 200mA (Io)", Supplier 1=DigiKey, Supplier Device Package=SOD-123
DPX1 DPX2: "RF DIPLEXER DC-42/54-1000 MHz NU1620 -40°C~85°C", M_Frequency(MHz)=NA, M_RatedPower(W)=1, Manufacturer 1="MINI CIRCUIT", Package=NU1620, PackageType=SMD, Check=Approved, M_AmpersPerContact=NA, M_Duty Cycle(%)=NA, M_ESR(mΩ)=NA, M_MatingCycle=NA, M_Number_of_Bits(K)=NA, M_Number_of_Pins=20, M_Number_of_Transistors_Gates_or_Bits=NA, M_OperatingVoltage(V)=NA, M_ProgrammingCycles=NA, Manufacturer Part Number 1=DPLX-4254A0+, MaxHeight_mm=7.11, MSL Level=Level-1, Status=Active
F1: library part CMP-08605-000063-1, "FUSE BRD MNT 3A 125VAC/VDC 2SMD", Fuse Current=3A, Fuse Interrupt Ac Current=50A, Manufacturer="Littelfuse Inc", Max Fuse Ac Voltage=125V, Package=0451, Resistance=0.0227Ω, Temperature="-55°C to +125°C", Temperature Range High=+125°C, Temperature Range Low=-55°C, Automotive=No, Category=Fuse, ComponentLink2Description=Datasheet, ComponentLink2URL=https://www.littelfuse.com/~/media/electronics/datasheets/fuses/littelfuse_fuse_451_453_datasheet.pdf.pdf, Device Class L1="Circuit Protection", Device Class L2=Fuses, Device Class L3=unset, Digikey Description="FUSE BRD MNT 3A 125VAC/VDC 2SMD", Fuse Blow Speed=Fast, Fuse I2T=1.65A2Sec, Fuse Interrupt Dc Current=50A, Height=2.94mm, Lead Free=Yes, Manufacturer Part Number=0451003.MRL, Max Fuse Dc Voltage=125V, Mouser Description="Surface Mount Fuses 125V 3A", Octopart=https://octopart.com/0451003.mrl-littelfuse-566380, RoHS=TRUE, Voltage Rating=125V
FB1 FB6: library part MH1608-101Y, "FERRITE BEAD 100 OHM 0603 1LN", Current Rating (Max)=3A, DC Resistance (DCR) (Max)=40mOhm, Device Package="0603 (1608 Metric)", Manufacturer="Bourns Inc.", Operating Temperature="-55°C ~ 125°C", Supplier Part Number 1=MH1608-101YCT-ND, ComponentLink1Description=Datasheet, ComponentLink1URL=https://www.bourns.com/docs/Product-Datasheets/mh.pdf, ComponentLink2Description="DigiKey Link", ComponentLink2URL=https://www.digikey.com/en/products/detail/bourns-inc/MH1608-101Y/2563310, Filter Type="Power, Signal Line", Height (Max)="0.039\" (1.00mm)", LastUpdated="5/9/2023 8:13:07 PM", Lifecycle Status=Active, Minimum Order=1, Mounting Type="Surface Mount", Number of Lines=1, Package / Case="0603 (1608 Metric)", Packaging=TapeAndReel, Part Number=MH1608-101Y, Part Status=Active, PartId=645, Price=0.02, Series=MH, Size / Dimension="0.063\" L x 0.032\" W (1.60mm x 0.80mm)", Supplier 1=DigiKey, Impedance @ Frequency="100 Ohms @ 100 MHz"
FB4 FB5: library part CMP-0220-00052-2, Case Code (Imperial)=1210, Case Code (Metric)=3225, Case/Package=SMD/SMT, Current Rating=6A, DC Resistance (DCR)=900µΩ, Max Operating Temperature=125°C, Min Operating Temperature=-55°C, Test Frequency=100MHz, Tolerance=25%, Depth=3mm, Height=2.55mm, Impedance=91Ω, Length=8.5mm, Max Current Rating=6A, Max DC Current=6A, Mount="Surface Mount", NexarPartId=19122445, Number of Lines=1, Packaging="Cut Tape (CT)", REACH SVHC=Unknown, RoHS=Compliant, Shielding=Unshielded, Termination=SMD/SMT, Width=3mm
FL1: library part CMP-1342-00001-1, "Common Mode Filter, 700 Ohm Impedance, 8 A, 80 V, -40 to 85 degC, 4-Pin 12 x 11 x 6 mm SMD, RoHS, Reel", Insulation Resistance="10 M Ohm Min.", Manufacturer=TDK, Rated Current="8 A Max.", Rated Voltage="80 A Max.", Temperature Range="-40 to 85 degC", ComponentLink1Description="Manufacturer URL", ComponentLink1URL=http://www.global.tdk.com/, ComponentLink2Description=Datasheet, ComponentLink2URL=http://product.tdk.com/en/catalog/datasheets/e9713_acm.pdf, ComponentLink3Description="Package Specification", ComponentLink3URL=http://product.tdk.com/en/catalog/datasheets/e9713_acm.pdf, DatasheetVersion=Jul-14, DCR="6 mOhm Max.", Impedance@100 MHz="700 Ohm Typ.", Mounting Technology="Surface Mount", PackageDescription="4-Pin Surface Mount Device, Body 12 x 11 mm, Pitch 5.2 mm", Packing=Reel, PartNumber=ACM1211-701-2PL-TL01, RoHS=TRUE
J1: library part CMP-02766-000120-1, "CONN HEADER SMD 10POS 1.27MM", Color=Black, Max Operating Temperature=125°C, Min Operating Temperature=-55°C, Package Quantity=500, Connector Type="Male Pin", Contact Material=Bronze, Contact Mating Length=0.12inch, Contact Plating=Gold, Depth=5.84mm, Housing Color=Black, Housing Material=Polymer, Lead Free="Lead Free", Length=6.35mm, Mount="Surface Mount", Number of Contacts=10, Number of Positions=10, Number of Rows=2, Orientation=Straight, Packaging="Tape and Reel", Pitch=1.27mm, Radiation Hardening=No, Row Spacing=0.05inch, Termination=Solder
J2: "CONN HEADER R/A 14POS 2.54MM", Current Rating (Amps)="3A per Contact", Manufacturer="Harwin Inc.", Material Flammability Rating="UL94 V-0", Operating Temperature="-40°C ~ 105°C", Supplier Part Number 1=M20-9740746-ND, Insulation Color=Black, ComponentLink1Description=Datasheet, ComponentLink1URL=https://cdn.harwin.com/pdfs/M20-974.pdf, ComponentLink2Description="DigiKey Link", ComponentLink2URL=http://digikey.com/product-detail/en/harwin-inc/M20-9740746/M20-9740746-ND/3920721, Connector Type="Header, Cuttable", Contact Finish - Mating=Tin, Contact Finish - Post=Tin, Contact Material=Brass, Contact Shape=Square, Contact Type="Male Pin", Fastening Type=Push-Pull, LastUpdated="9/21/2022 7:19:11 PM", Lifecycle Status=Active, Minimum Order=1500, Mounting Type="Through Hole, Right Angle", Number of Positions=14, Number of Positions Loaded=All, Number of Rows=2, Packaging=Bulk, Part Number=M20-9740746, Part Status=Active, PartId=160, Price=0.24, Series=M20, Shrouding=Unshrouded, Style="Board to Board or Cable", Supplier 1=DigiKey, Termination=Solder, Insulation Material="Polyamide (PA6T), Nylon 6T"
J3: library part CMP-00257-00655589-1, "90130-1214 Conn Shrouded Header (4 Sides) HDR 14 POS 2.54mm Solder ST Top Entry Thru-Hole C-Grid III™ Tray", Color=Black, Contact Resistance=20mΩ, Current Rating=3A, Insulation Resistance=5GΩ, Max Operating Temperature=125°C, Max Voltage Rating (DC)=350.35kV, Min Operating Temperature=-55°C, Voltage Rating=350V, Connector Type="Male Pin", Contact Gender=Male, Contact Material=Brass, Contact Mating Length=6.7564mm, Contact Plating=Gold, Gender=Male, Glow Wire Compliant=Non-compliant, Housing Color=Black, Housing Material=Polyester, Lead Free="Lead Free", Lead Length=2.9mm, Lead Pitch=2.54mm, Material="Glass, Polyester", Mating Post Length=6.75mm, Mount="Through Hole", NexarPartId=655589, Number of Circuits=14, Number of Contacts=14, Number of Poles=14, Number of Positions=14, Number of Rows=2, Orientation=Vertical, Pitch=2.54mm, Radiation Hardening=No, REACH SVHC="No SVHC", RoHS=Compliant, Row Spacing=2.54mm, Schedule B=8536694040, Termination=Solder, Voltage Rating (AC)=350V, Voltage Rating (DC)=350V, Working Voltage=350V
J4: "CONN HEADER VERT 3POS 2.54MM", Current Rating (Amps)=3A, Insulation Color=Black, Manufacturer="Würth Elektronik", Material Flammability Rating="UL94 V-0", Operating Temperature="-40°C ~ 105°C", Supplier Part Number 1=732-5316-ND, ComponentLink1Description=Datasheet, ComponentLink1URL=https://katalog.we-online.de/em/datasheet/6130xx11121.pdf, ComponentLink2Description="DigiKey Link", ComponentLink2URL=https://www.digikey.com/en/products/detail/würth-elektronik/61300311121/4846825, Connector Type=Header, Contact Finish - Mating=Gold, Contact Length - Mating="0.236\" (6.00mm)", Contact Length - Post="0.118\" (3.00mm)", Contact Material="Copper Alloy", Contact Shape=Square, Contact Type="Male Pin", Fastening Type=Push-Pull, Insulation Height="0.100\" (2.54mm)", Insulation Material="Polyamide (PA6T), Nylon 6T", LastUpdated="10/18/2024 1:43:15 PM", Lifecycle Status=Active, Minimum Order=1, Mounting Type="Through Hole", Number of Positions=3, Number of Positions Loaded=All, Number of Rows=1, Overall Contact Length="0.454\" (11.54mm)", Packaging=Bulk, Part Number=61300311121, Part Status=Active, PartId=189, Pitch - Mating="0.100\" (2.54mm)", Price=0.07, Row Spacing - Mating="-40°C ~ 105°C", Series=WR-PHD, Shrouding=Unshrouded, Style="Board to Board or Cable", Supplier 1=DigiKey, Termination=Solder
J5: "CONN PWR JACK 2.5X5.5MM SOLDER", Current Rating (Amps)=5A, Manufacturer="CUI Devices", Material Flammability Rating="UL94 V-0", Supplier Part Number 1=CP-002BHPJCT-ND, Voltage - Rated=24VDC, Actual Diameter="0.098\" (2.50mm ID), 0.256\" (6.50mm OD)", ComponentLink1Description=Datasheet, ComponentLink1URL=https://www.cuidevices.com/product/resource/digikeypdf/pj-002bh-smt-tr.pdf, ComponentLink2Description="DigiKey Link", ComponentLink2URL=http://digikey.com/product-detail/en/cui-devices/PJ-002BH-SMT-TR/CP-002BHPJCT-ND/669694, Connector Type=Jack, Features="Board Guide, Solder Retention", Gender=Male, Industry Recognized Mating Diameter="2.50mm ID (0.098\"), 5.50mm OD (0.217\")", Internal Switch(s)="Single Switch, Normally Closed", LastUpdated="5/26/2020 1:34:08 PM", Lifecycle Status=Active, Mating Length/Depth="0.350\" (8.90mm)", Minimum Order=1, Mounting Type="Surface Mount, Right Angle", Number of Positions/Contacts="2 Conductors, 3 Contacts", Packaging=TapeAndReel, Part Number=PJ-002BH-SMT-TR, Part Status=Active, Price=0.90, Series=-, Shielding=Unshielded, Supplier 1=DigiKey, Termination=Solder
J6 J7: "CONN F PLUG BOARD EDGE 75OHM -40°C~140°C", M_Frequency(MHz)=NA, Manufacturer 1=DOSIN, Package="F TYPE", PackageType=SMD, Check=Approved, ComponentLink1Description=DOSIN, ComponentLink1URL=https://www.dosinconn.com/wp-content/uploads/2022/07/DOSIN-803-0130.pdf, Location=NA, M_Duty Cycle(%)=NA, M_ESR(mΩ)=NA, M_Number_of_Bits(K)=NA, M_Number_of_Transistors_Gates_or_Bits=NA, M_OperatingPower(W)=NA, M_OperatingVoltage(V)=NA, M_ProgrammingCycles=NA, M_RatedPower(W)=NA, M_RatedVoltage(V)=NA, M_ThermalResistance(θJABC)(°C/W)=NA, Manufacturer Part Number 1=DOSIN-803-0130, MaxHeight_mm=4.75, Status=Active
J8: "CONN UMCC(UFL) COAX MALE 50 OHM SMD -40°C~85°C", Manufacturer 1="TE CONNECTIVITY AMP CONNECTORS", PackageType=SMD, Supplier Part Number 1=A144746TR-ND, Check=Approved, ComponentLink1Description=Digi-Key, ComponentLink1URL=https://www.digikey.com/en/products/detail/te-connectivity-amp-connectors/2337019-1/9974052, Location=NA, Manufacturer Part Number 1=2337019-1, MaxHeight_mm=1.25, Package=2337019-1, Status=Active, Supplier 1=Digi-Key, UnitPrice=0.19
J9 J10 J11 J12: "COAX SW RF DIA 50OHM SMD -40°C~85°C", M_Frequency(MHz)=NA, Manufacturer 1=HIROSE, PackageType=SMD, Check=Approved, ComponentLink2Description=Datasheet, ComponentLink2URL=https://www.digikey.com/en/products/detail/hirose-electric-co-ltd/MS-156C3/5133612?_gl=1*fkpag6*_up*MQ..*_gs*MQ..&gclid=Cj0KCQjwrs7RBhDuARIsAIVfBD2sjkF7JQckfmjgpjtW1QLRvux6_yJsbSrD39rXaoqan7O-Y7Tq6UkaAnthEALw_wcB&gclsrc=aw.ds&gbraid=0AAAAADrbLlhqKD3R2x8SpsFg283DEbllO, Location=NA, M_Duty Cycle(%)=NA, M_ESR(mΩ)=NA, M_Number_of_Bits(K)=NA, M_Number_of_Transistors_Gates_or_Bits=NA, M_OperatingPower(W)=NA, M_OperatingVoltage(V)=NA, M_ProgrammingCycles=NA, M_RatedPower(W)=NA, M_RatedVoltage(V)=NA, M_ThermalResistance(θJABC)(°C/W)=NA, Manufacturer Part Number 1=MS-156C3, MaxHeight_mm=1.35, Status=Active
L1 L3: library part CMP-1353-00006-7, "We-lhmi; 10000NH; Composite Iron Multilayer SMD Induc., 1040 Case; .012GHZ 5.2A", Ambient Temperature Range High=85°C, Ambient Temperature Range Low=-40°C, Case/Package=Nonstandard, Current Rating=5.2A, DC Resistance (DCR)=27mΩ, Frequency=12MHz, Inductance=10µH, Inductance Tolerance=20%, Max Operating Temperature=125°C, Saturation Current=7.9A, Series Resistance=30mΩ, Test Frequency=100kHz, Composition=Wirewound, Core Material="Composite, Ferrite", Depth=10mm, Height=3.8mm, Height - Seated (Max)=3.9878mm, Length=11mm, Max DC Current=5.2A, Min Operating Temperature=-40°C, Mount="Surface Mount", REACH SVHC=Unknown, RMS Current (Irms)=5.2A, RoHS=Compliant, Self Resonant Frequency=12MHz, Shielding=Shielded, Termination=SMD/SMT, Tolerance=20%, Width=10mm
L2: library part CMP-03913-134708979-2, "Power Inductor, 6.8UH, 4.5A, Shielded Rohs Compliant: Yes", Ambient Temperature Range High=100°C, Ambient Temperature Range Low=-55°C, Current Rating=4A, DC Resistance (DCR)=49.9mΩ, Inductance=6.8µH, Max Operating Temperature=155°C, Height=3mm, Length=7mm, Min Operating Temperature=-55°C, RoHS=Compliant, Width=6.5mm
L4: "IND 1uH 800mA 100mΩ DCR 0805 ±20% -55°C~125°C", Manufacturer 1=TDK, Manufacturer Part Number 1=MLZ2012M1R0HTD25, Package=0805, PackageType=SMD, Supplier Part Number 1=445-17075-2-ND, Tolerance=±20%, Check=Approved, ComponentLink1Description=DigiKey, ComponentLink1URL=https://www.digikey.lv/en/products/detail/tdk/MLZ2012M1R0HTD25/4743204, Location=NA, MaxHeight_mm=1.45, MSL Level=Level-1, Status=Active, Supplier 1=Digi-Key
L5 L6: "IND 820nH 400mA Q:45@400MHz ±3% 1008 -55°C~125°C", M_OperatingPower(W)=NA, Manufacturer 1=MURATA, Manufacturer Part Number 1=LQW2UASR82J00L, Package=1008, PackageType=SMD, Tolerance=±5%, Check=Approved, ComponentLink3Description=Digikey, ComponentLink3URL=https://www.digikey.lv/en/products/detail/murata-electronics/LQW2UASR82J00L/2674720, M_AmpersPerContact=NA, M_Duty Cycle(%)=NA, M_ESR(mΩ)=NA, M_MatingCycle=NA, M_Number_of_Bits(K)=NA, M_Number_of_Pins=2, M_Number_of_Transistors_Gates_or_Bits=NA, M_OperatingVoltage(V)=NA, M_ProgrammingCycles=NA, M_RatedPower(W)=NA, M_RatedVoltage(V)=NA, MaxHeight_mm=2.03, MSL Level=Level-1, Status=Active, UnitPrice=0.15
L7 L8 L11 L12 L14 L15 L16: "IND 9.1nH 500mA 270mΩ DCR 0402 ±5% -55°C~125°C", M_Frequency(MHz)=NA, Manufacturer 1="MURATA ELECTRONICS", Manufacturer Part Number 1=LQG15HN9N1J02D, Package=0402, PackageType=SMD, Supplier Part Number 1=490-6566-6-ND, Tolerance=±5%, Assembly=DNP, Check=Approved, ComponentLink1Description=Digikey, ComponentLink1URL=https://www.digikey.com/en/products/detail/murata-electronics/LQG15HN9N1J02D/2594215, ComponentLink2Description=Datasheet, ComponentLink2URL="D:\SAVRONIK_SVN\Donanım\trunk\ALTIUM\Central Library\Datasheets\Inductor\LQG15HN9N1J02D_Datasheet.pdf", Location=NA, M_AmpersPerContact=NA, M_Duty Cycle(%)=NA, M_ESR(mΩ)=NA, M_MatingCycle=NA, M_Number_of_Bits(K)=NA, M_Number_of_Pins=2, M_Number_of_Transistors_Gates_or_Bits=NA, M_OperatingPower(W)=NA, M_OperatingVoltage(V)=NA, M_ProgrammingCycles=NA, M_RatedPower(W)=NA, M_RatedVoltage(V)=NA, M_ThermalResistance(θJABC)(°C/W)=NA, MaxHeight_mm=0.5, MSL Level=Level-1, Status=Active, Supplier 1=Digikey, UnitPrice=0.1
L9 L10 L17 L19: "IND 5.6nH 650mA 200mΩ DCR 0402 ±0.3nH -55°C~125°C", M_Frequency(MHz)=NA, Manufacturer 1="MURATA ELECTRONICS", Manufacturer Part Number 1=LQG15HS5N6S02D, Package=0402, PackageType=SMD, Supplier Part Number 1=490-2619-2-ND, Tolerance=±0.3nH, Check=Approved, ComponentLink1Description=Digikey, ComponentLink1URL=https://www.digikey.com/en/products/detail/murata-electronics/LQG15HS5N6S02D/662868?s=N4IgTCBcDaIDIEUDiBGArACQMpoHIDYsAGMAERAF0BfIA, ComponentLink2Description=Datasheet, ComponentLink2URL="D:\SAVRONIK_SVN\Donanım\trunk\ALTIUM\Central Library\Datasheets\Inductor\LQG15HS5N6S02D_Datasheet.pdf", Location=NA, M_AmpersPerContact=NA, M_Duty Cycle(%)=NA, M_ESR(mΩ)=NA, M_MatingCycle=NA, M_Number_of_Bits(K)=NA, M_Number_of_Pins=2, M_Number_of_Transistors_Gates_or_Bits=NA, M_OperatingPower(W)=NA, M_OperatingVoltage(V)=NA, M_ProgrammingCycles=NA, M_RatedPower(W)=NA, M_RatedVoltage(V)=NA, M_ThermalResistance(θJABC)(°C/W)=NA, MaxHeight_mm=0.6, MSL Level=Level-1, Status=Active, Supplier 1=Digikey, UnitPrice=0.1
  L9 L10 L17: Assembly=DNP
L13: "IND 100nH 310mA 1.57Ω DCR 0402 ±5% -40°C~125°C", M_Frequency(MHz)=NA, Manufacturer 1=COILCRAFT, Manufacturer Part Number 1=0402DC-R10XJRW, Package=0402, PackageType=SMD, Supplier Part Number 1=2457-0402DC-R10XJRW-ND, Tolerance=±5%, Check=Approved, ComponentLink1Description=Digikey, ComponentLink1URL=https://www.digikey.com/en/products/detail/coilcraft/0402DC-R10XJRW/12714710?_gl=1*8evbuw*_up*MQ..&gclid=EAIaIQobChMI_Lbip9H7hQMVUZdoCR3mHQjgEAAYAiAAEgLOLPD_BwE, ComponentLink2Description=Datasheet, ComponentLink2URL="D:\SAVRONIK_SVN\Donanım\trunk\ALTIUM\Central Library\Datasheets\Inductor\0402DC-R10XJRW_Datasheet.pdf", Location=NA, M_AmpersPerContact=NA, M_Duty Cycle(%)=NA, M_ESR(mΩ)=NA, M_MatingCycle=NA, M_Number_of_Bits(K)=NA, M_Number_of_Pins=2, M_Number_of_Transistors_Gates_or_Bits=NA, M_OperatingPower(W)=NA, M_OperatingVoltage(V)=NA, M_ProgrammingCycles=NA, M_RatedPower(W)=NA, M_RatedVoltage(V)=NA, M_ThermalResistance(θJABC)(°C/W)=NA, MaxHeight_mm=0.55, MSL Level=Level-1, SAP=1033601, Status=Active, Supplier 1=Digikey, UnitPrice=0.1
L18: "IND 9.1nH 1.6A 70mΩ DCR 0402 ±2% -40°C~125°C", M_Frequency(MHz)=NA, Manufacturer 1=COILCRAFT, Manufacturer Part Number 1=0402DC-9N1XGRW, Package=0402, PackageType=SMD, Supplier Part Number 1=2457-0402DC-9N1XGRW-ND, Tolerance=±2%, Check=Approved, ComponentLink1Description=Digikey, ComponentLink1URL=https://www.digikey.com/en/products/detail/coilcraft/0402DC-9N1XGRW/12714547, ComponentLink2Description=Datasheet, ComponentLink2URL="D:\SAVRONIK_SVN\Donanım\trunk\ALTIUM\Central Library\Datasheets\Inductor\0402DC-9N1XGRW_Datasheet.pdf", Location=NA, M_AmpersPerContact=NA, M_Duty Cycle(%)=NA, M_ESR(mΩ)=NA, M_MatingCycle=NA, M_Number_of_Bits(K)=NA, M_Number_of_Pins=2, M_Number_of_Transistors_Gates_or_Bits=NA, M_OperatingPower(W)=NA, M_OperatingVoltage(V)=NA, M_ProgrammingCycles=NA, M_RatedPower(W)=NA, M_RatedVoltage(V)=NA, M_ThermalResistance(θJABC)(°C/W)=NA, MaxHeight_mm=0.5, MSL Level=Level-1, SAP=1027917, Status=Active, Supplier 1=Digikey, UnitPrice=0.1
MTG1 MTG2 MTG3 MTG4 MTG5 MTG6 MTG7 MTG8 MTG9 MTG10 MTG11 MTG12 MTG13: library part MTG3MM
Q1: library part CMP-1058-00640-1, "Power MOSFET, 8 V, +/- 1.3 A, High Side Load Switch with Level-Shift, P-Channel, 6-Pin SC70, Pb-Free, Tape and Reel", Manufacturer="On Semiconductor", Package Type="SC-88-6 / SC-70-6 / SOT-363-6", Channel Polarity="P Channel", ComponentLink1Description="Manufacturer URL", ComponentLink1URL=http://www.onsemi.com/, ComponentLink2Description=Datasheet, ComponentLink2URL=http://www.onsemi.com/pub_link/Collateral/NTJD1155L-D.PDF, ComponentLink3Description="Package Specification", ComponentLink3URL=http://www.onsemi.com/pub_link/Collateral/SMF05C-D.PDF, Configuration=Dual, DatasheetVersion="Rev. 5", ID Max (A)=1.3, Mounting Technology="Surface Mount", PackageDescription="6-Pin Small Outline Transistor, Body 2 x 1.25 mm, Pitch 0.65 mm", PackageReference=SC70-6-419B-02_W, PackageVersion="Rev. W", Packing="Tape and Reel", PartNumber=NTJD1155LT1G, RoHS=Pb-Free, V(BR)DSS Min (V)=8, VGS(th) Max (V)=1
R1: library part RE0402FRE071ML, "RES SMD 1M OHM 1% 1/16W 0402", Device Package="0402 (1005 Metric)", Manufacturer=Yageo, Operating Temperature="-55°C ~ 155°C", Power (Watts)="0.063W, 1/16W", Supplier Device Package=0402, Supplier Part Number 1=13-RE0402FRE071MLCT-ND, Temperature Coefficient=±50ppm/°C, Tolerance=±1%, ComponentLink1Description=Datasheet, ComponentLink1URL=https://www.yageo.com/upload/media/product/productsearch/datasheet/rchip/PYu-RE_105_RoHS_L_7.pdf, ComponentLink2Description="DigiKey Link", ComponentLink2URL=https://www.digikey.com/en/products/detail/yageo/RE0402FRE071ML/5923009, Composition="Thick Film", Height - Seated (Max)="0.015\" (0.37mm)", LastUpdated="4/6/2026 7:40:51 PM", Lifecycle Status=Active, Minimum Order=1, Number of Terminations=2, Package / Case="0402 (1005 Metric)", Packaging=CutTape, Part Number=RE0402FRE071ML, PartId=78753, Price=0.01, Resistance="1 MOhms", Series=RE, Size / Dimension="0.039\" L x 0.020\" W (1.00mm x 0.50mm)", Supplier 1=DigiKey
R2 R8 R38: library part RC0402FR-13100KL, "RES 100K OHM 1% 1/16W 0402", Device Package="0402 (1005 Metric)", Manufacturer=Yageo, Operating Temperature="-55°C ~ 155°C", Power (Watts)="0.063W, 1/16W", Supplier Device Package=0402, Supplier Part Number 1=13-RC0402FR-13100KLCT-ND, Temperature Coefficient=±100ppm/°C, Tolerance=±1%, ComponentLink1Description=Datasheet, ComponentLink1URL=https://www.yageo.com/upload/media/product/productsearch/datasheet/rchip/PYu-RC_Group_51_RoHS_L_11.pdf, ComponentLink2Description="DigiKey Link", ComponentLink2URL=https://www.digikey.com/en/products/detail/yageo/RC0402FR-13100KL/13546624, Composition="Thick Film", Features="Moisture Resistant", Height - Seated (Max)="0.016\" (0.40mm)", LastUpdated="4/6/2026 7:40:59 PM", Lifecycle Status=Active, Minimum Order=1, Number of Terminations=2, Package / Case="0402 (1005 Metric)", Packaging=CutTape, Part Number=RC0402FR-13100KL, Part Status=Active, PartId=59069, Price=0.01, Resistance="100 kOhms", Series=RC_L, Size / Dimension="0.039\" L x 0.020\" W (1.00mm x 0.50mm)", Supplier 1=DigiKey